# EAGLE board zxld383-boost-driver-12mm-mk-3 (EAGLE 6.4)
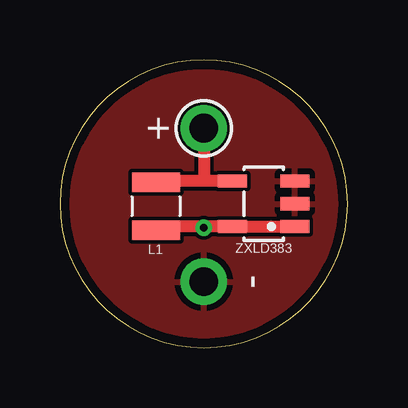
[diagram p0: board, top side]
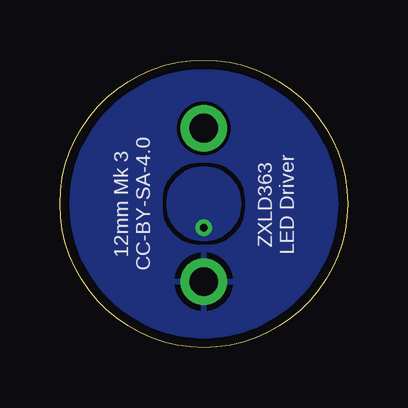
[diagram p1: board, bottom side, seen from below]

Size 12 x 12 mm. Coordinates in mm from the lower left corner, seen from the top.
Outline: 0,6 arc90 6,0 arc90 12,6 arc90 6,12 arc90 0,6
Copper layers (1*16): Top 0.0356mm / dielectric 1.5011mm / Bottom 0.0356mm
Design rules "LaenPCBOrder2": minimum track width 6mil, minimum drill 13mil, track to track 6mil, track to pad 6mil, pad to pad 6mil, via to via 6mil, smd to smd 6mil, copper to edge 15mil, drill to drill 6mil, minimum pad ring 7mil, minimum via ring 7mil, stop-mask expansion 3mil, vias tented up to drill 20mil, thermal gap 10mil

## Footprints (pad centres in the part's own frame; a part is rotated, then mirrored left to right if it is on the bottom)
1X01-1.2MM = drill 1.2 pad 1.93: P$1 0,0
1X01-1.2MM-NS = drill 1.2 pad 1.93: P$1 0,0
1X01_NOSILK_NOSTOP = drill 0.33: P$1 0,0
1007 = smd 2 x 0.8: 1 0,1; 2 0,-1
TSOT-23-5 = smd 1.2 x 0.55: 1 -1.3,0.95; 2 -1.3,0; 3 -1.3,-0.95; 4 1.3,-0.95; 5 1.3,0.95

## Placement (x,y rotation side)
+  M01PTH-1.2MM  [1X01-1.2MM]  6,9.15 90 top
-  M01PTH-1.2MM-NS  [1X01-1.2MM-NS]  6,2.75 270 top
JP1  M01NOT-A-VIA-NOPE  [1X01_NOSILK_NOSTOP]  6,5 0 top
L1  4.7uH  [1007]  4,5.9 180 top
ZXLD383  ZXLD383  [TSOT-23-5]  8.5,6 180 top

## Library data of the parts
+ - JP1 L1 ZXLD383 = A_butts

## Nets
GND: -.P$1 ZXLD383.2 ZXLD383.3
VCC: JP1.P$1 L1.1 ZXLD383.1 ZXLD383.5
VOUT: +.P$1 L1.2 ZXLD383.4

## Tracks (layer width: path | path; a pad name or v marks a point on that pad's centre or on a via)
GND
  pour Top (rank 6): 6,0 arc-90 0,6 arc-90 6,12 arc-90 12,6 arc-90
  pour Bottom (rank 6): 6,0 arc-90 0,6 arc-90 6,12 arc-90 12,6 arc-90
VCC
  Top 0.5: 6,5.05 ZXLD383.5 ZXLD383.1 | 6,5.05 4.15,5.05 L1.1 | JP1.P$1 6,5.05
  pour Bottom: 4.5,6 arc90 6,4.5 arc90 7.5,6 arc90 6,7.5 arc90
VOUT
  Top 0.5: ZXLD383.4 6,6.95 | 6,6.95 4.05,6.95 L1.2 | +.P$1 6,6.95

## Text on the board
bPlace: ZXLD363 / LED Driver | 12mm Mk 3 / CC-BY-SA-4.0